# Altium PCB USB2CAN_acsii.PcbDoc
Units mm, origin at the board's own origin, x right, y up, seen from the top; angles counter-clockwise.
Board outline 42 x 17 mm, 2 copper layers (Top Layer, Bottom Layer), stack 1.671 mm thick; 23 components, 13 nets, 125 pads, 41 vias.
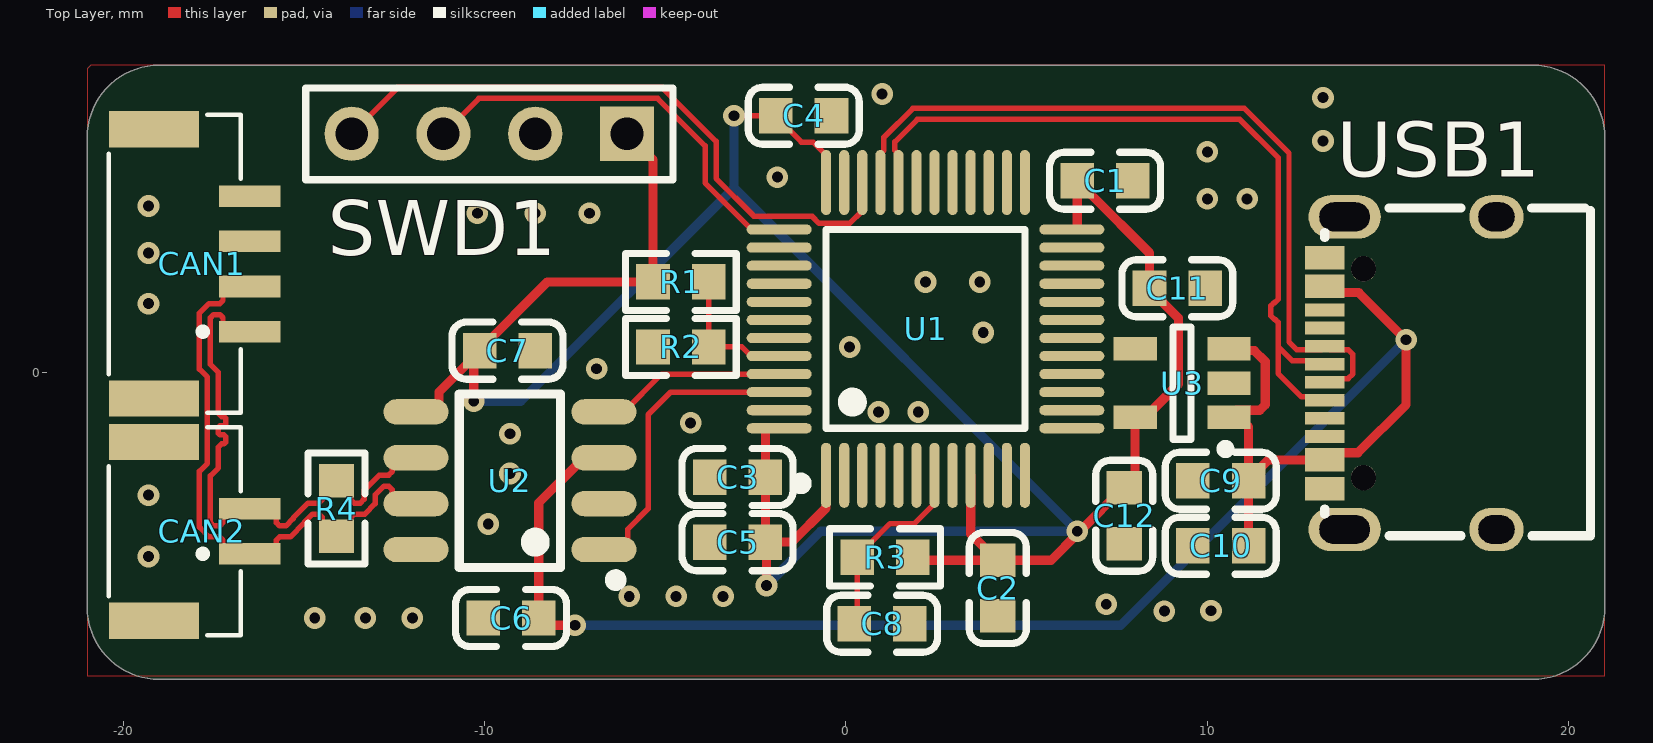
[diagram p0: Top Layer view]
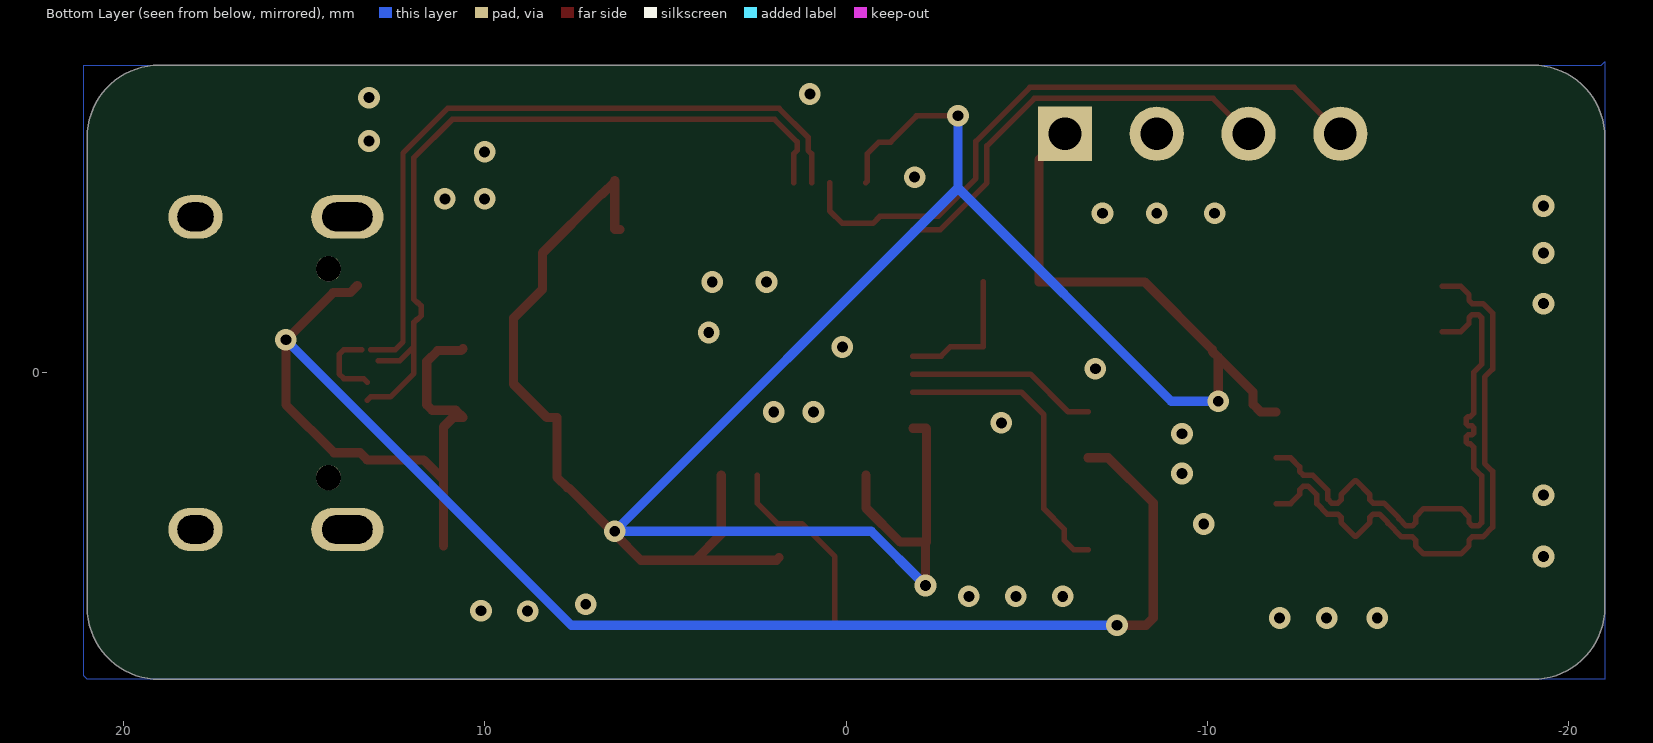
[diagram p1: Bottom Layer view, seen from below]

## Layer stack, top to bottom
Top Solder: solder mask 0.0102, Solder Resist, Dk 3.5
Top Layer: signal copper 0.0356
Dielectric 1: dielectric 1.6, FR-4, Dk 4.8
Bottom Layer: signal copper 0.0356
Bottom Solder: solder mask 0.0102, Solder Resist, Dk 3.5

## Board outline
-21,-6.5 -21,6.5 cw(c-19,6.5) -19,8.5 19,8.5 cw(c19,6.5) 21,6.5 21,-6.5 cw(c19,-6.5) 19,-8.5 -19,-8.5 cw(c-19,-6.5)

## Design rules (kind name [scope] priority, off if disabled: settings)
AssemblyTestPointUsage [All] p0: scope1count=1 scope1_0_kind=Board scope1_0_value=Board scope2count=1 scope2_0_kind=Board scope2_0_value=Board commentlength=0
AssemblyTestpoint [All] p0: scope1count=1 scope1_0_kind=Board scope1_0_value=Board scope2count=1 scope2_0_kind=Board scope2_0_value=Board commentlength=0
BoardOutlineClearance [All] p0: scope1count=1 scope1_0_kind=Board scope1_0_value=Board scope2count=1 scope2_0_kind=Board scope2_0_value=Board commentlength=0 gap=0.2
BoardOutlineClearance [All] p1: gap=0.2 ignorepadtopadclearanceinfootprint=FALSE
Clearance [All] p0: scope1count=1 scope1_0_kind=Board scope1_0_value=Board scope2count=1 scope2_0_kind=Board scope2_0_value=Board commentlength=0 gap=0.152
Clearance [All] p1: gap=0.152 ignorepadtopadclearanceinfootprint=TRUE
ComponentClearance [All] p0: scope1count=1 scope1_0_kind=Board scope1_0_value=Board scope2count=1 scope2_0_kind=Board scope2_0_value=Board commentlength=0 gap=0.254 collisioncheckmode=3
DiffPairsRouting [All] p0: scope1count=1 scope1_0_kind=Board scope1_0_value=Board scope2count=1 scope2_0_kind=Board scope2_0_value=Board commentlength=0
DiffPairsRouting [All] p1: maxlimit=0.152 minlimit=0.152 mostfreqgap=0.152 toplayer_minwidth=0.152 toplayer_maxwidth=0.152 toplayer_prefwidth=0.152 bottomlayer_minwidth=0.152 bottomlayer_maxwidth=0.152 bottomlayer_prefwidth=0.152 maxuncoupledlength=12.7
FabricationTestPointUsage [All] p0: scope1count=1 scope1_0_kind=Board scope1_0_value=Board scope2count=1 scope2_0_kind=Board scope2_0_value=Board commentlength=0 valid=0 allowmultiple=FALSE
FabricationTestpoint [All] p0: scope1count=1 scope1_0_kind=Board scope1_0_value=Board scope2count=1 scope2_0_kind=Board scope2_0_value=Board commentlength=0 side=3 testpointundercomponent=TRUE minsize=1.016 maxsize=2.54 preferedsize=1.524 minholesize=0 maxholesize=1.016 preferedholesize=0.813 testpointgrid=0.025
FanoutControl Fanout_Default [All] p0: scope1count=1 scope1_0_kind=Board scope1_0_value=Board scope2count=1 scope2_0_kind=Board scope2_0_value=Board commentlength=30 // Fanout_Default (Default Rule)
FanoutControl Fanout_Small [All] p0 off: scope1count=1 scope1_0_kind=Board scope1_0_value=Board scope2count=1 scope2_0_kind=Board scope2_0_value=Board commentlength=84 // Protel DXP Scope 1 Expression Was: (CompPinCount < 5)   Fanout_Small (Default Rule)
FanoutControl Fanout_SOIC [All] p0 off: scope1count=1 scope1_0_kind=Board scope1_0_value=Board scope2count=1 scope2_0_kind=Board scope2_0_value=Board commentlength=71 // Protel DXP Scope 1 Expression Was: IsSOIC   Fanout_SOIC (Default Rule)
FanoutControl Fanout_LCC [All] p0 off: scope1count=1 scope1_0_kind=Board scope1_0_value=Board scope2count=1 scope2_0_kind=Board scope2_0_value=Board commentlength=69 // Protel DXP Scope 1 Expression Was: IsLCC   Fanout_LCC (Default Rule)
FanoutControl Fanout_BGA [All] p0 off: scope1count=1 scope1_0_kind=Board scope1_0_value=Board scope2count=1 scope2_0_kind=Board scope2_0_value=Board commentlength=69 // Protel DXP Scope 1 Expression Was: IsBGA   Fanout_BGA (Default Rule)
Height [All] p0: scope1count=1 scope1_0_kind=Board scope1_0_value=Board scope2count=1 scope2_0_kind=Board scope2_0_value=Board commentlength=0
HoleSize [All] p0: scope1count=1 scope1_0_kind=Board scope1_0_value=Board scope2count=1 scope2_0_kind=Board scope2_0_value=Board commentlength=0 absolutevalues=TRUE maxlimit=10 minlimit=0.025 maxpercent=80.000 minpercent=20.000
HoleSize [All] p1: absolutevalues=TRUE maxlimit=10 minlimit=0.025 maxpercent=80.000 minpercent=20.000
HoleToHoleClearance [All] p0: scope1count=1 scope1_0_kind=Board scope1_0_value=Board scope2count=1 scope2_0_kind=Board scope2_0_value=Board commentlength=0
LayerPairs [All] p0: scope1count=1 scope1_0_kind=Board scope1_0_value=Board scope2count=1 scope2_0_kind=Board scope2_0_value=Board commentlength=0 enforce=TRUE
MinimumSolderMaskSliver [All] p0: scope1count=1 scope1_0_kind=Board scope1_0_value=Board scope2count=1 scope2_0_kind=Board scope2_0_value=Board commentlength=0
MinimumSolderMaskSliver [All] p1: minsoldermaskwidth=0
NetAntennae [All] p0: scope1count=1 scope1_0_kind=Board scope1_0_value=Board scope2count=1 scope2_0_kind=Board scope2_0_value=Board commentlength=0
PasteMaskExpansion [All] p0: scope1count=1 scope1_0_kind=Board scope1_0_value=Board scope2count=1 scope2_0_kind=Board scope2_0_value=Board commentlength=0 expansion=0
PlaneClearance [All] p0: scope1count=1 scope1_0_kind=Board scope1_0_value=Board scope2count=1 scope2_0_kind=Board scope2_0_value=Board commentlength=0 clearance=0.508
PlaneConnect [All] p0: scope1count=1 scope1_0_kind=Board scope1_0_value=Board scope2count=1 scope2_0_kind=Board scope2_0_value=Board commentlength=0 planeconnectstyle=Relief reliefexpansion=0.508 reliefentries=4 reliefconductorwidth=0.254 reliefairgap=0.254
PolygonConnect [All] p0: scope1count=1 scope1_0_kind=Board scope1_0_value=Board scope2count=1 scope2_0_kind=Board scope2_0_value=Board commentlength=0 connectstyle=Direct reliefconductorwidth=0.254 reliefentries=4 polygonreliefangle="90 Angle"
PolygonConnect [All] p1: connectstyle=Direct reliefconductorwidth=0.254 reliefentries=4 polygonreliefangle="90 Angle" airgapwidth=0.254
RoutingCorners [All] p0: scope1count=1 scope1_0_kind=Board scope1_0_value=Board scope2count=1 scope2_0_kind=Board scope2_0_value=Board commentlength=0 cornerstyle=45-Degree minsetback=2.54 maxsetback=2.54
RoutingLayers [All] p0: scope1count=1 scope1_0_kind=Board scope1_0_value=Board scope2count=1 scope2_0_kind=Board scope2_0_value=Board commentlength=0 top layer=Automatic bottom layer=Automatic
RoutingPriority [All] p0: scope1count=1 scope1_0_kind=Board scope1_0_value=Board scope2count=1 scope2_0_kind=Board scope2_0_value=Board commentlength=0
RoutingTopology [All] p0: scope1count=1 scope1_0_kind=Board scope1_0_value=Board scope2count=1 scope2_0_kind=Board scope2_0_value=Board commentlength=0 topology=Shortest
RoutingVias [All] p0: scope1count=1 scope1_0_kind=Board scope1_0_value=Board scope2count=1 scope2_0_kind=Board scope2_0_value=Board commentlength=0 holewidth=0.711 width=1.27 viastyle="Through Hole" minholewidth=0.711 minwidth=1.27 maxholewidth=0.711 maxwidth=1.27
RoutingVias [All] p1: holewidth=0.711 width=1.27 viastyle="Through Hole" minholewidth=0.711 minwidth=1.27 maxholewidth=0.711 maxwidth=1.27 useviatemplates=TRUE viatemplateguid#1={478E94E7-4BE6-4715-A8F8-C5F01D15FB3F} viatemplatename#1=v60h30m0mx0
ShortCircuit [All] p0: scope1count=1 scope1_0_kind=Board scope1_0_value=Board scope2count=1 scope2_0_kind=Board scope2_0_value=Board commentlength=0 allowed=FALSE
SilkToBoardRegionClearance [All] p0: scope1count=1 scope1_0_kind=Board scope1_0_value=Board scope2count=1 scope2_0_kind=Board scope2_0_value=Board commentlength=0
SilkToSilkClearance [All] p0: scope1count=1 scope1_0_kind=Board scope1_0_value=Board scope2count=1 scope2_0_kind=Board scope2_0_value=Board commentlength=0
SilkToSilkClearance [All] p1: silktosilkclearance=0
SilkToSolderMaskClearance [All] p0 off: scope1count=1 scope1_0_kind=Board scope1_0_value=Board scope2count=1 scope2_0_kind=Board scope2_0_value=Board commentlength=44 // Protel DXP Scope 1 Expression Was: IsPad
SilkToSolderMaskClearance [IsPad] p1: minsilkscreentomaskgap=0 clearancetoexposedcopper=TRUE
SolderMaskExpansion [All] p0: scope1count=1 scope1_0_kind=Board scope1_0_value=Board scope2count=1 scope2_0_kind=Board scope2_0_value=Board commentlength=0 expansion=0.102
SolderMaskExpansion [All] p1: expansion=0.102 istentingtop=FALSE
UnRoutedNet [All] p0: scope1count=1 scope1_0_kind=Board scope1_0_value=Board scope2count=1 scope2_0_kind=Board scope2_0_value=Board commentlength=0
UnpouredPolygon [All] p0: scope1count=1 scope1_0_kind=Board scope1_0_value=Board scope2count=1 scope2_0_kind=Board scope2_0_value=Board commentlength=0
Width [All] p0: scope1count=1 scope1_0_kind=Board scope1_0_value=Board scope2count=1 scope2_0_kind=Board scope2_0_value=Board commentlength=0 maxlimit=10 minlimit=0.152 preferedwidth=0.254
Width [All] p1: maxlimit=10 minlimit=0.152 preferedwidth=0.254
25 further rules are at their usual default settings.

## Classes and differential pairs
differential pair USB: +USB_P -USB_N
differential pair " ": +CAN_P -CAN_N

## Components (designator, comment, footprint, x,y, rotation, side; value= is the part's Value field where it differs from the comment)
C1 "0.1uF" 0603_C 7.17,5.3 r180 top
C2 "0.1uF" 0603_C 4.2,-5.97 r90 top
C3 "0.1uF" 0603_C -3,-2.9 r0 top
C4 "0.1uF" 0603_C -1.17,7.1 r180 top
C5 "0.1uF" 0603_C -3,-4.7 r0 top
C6 "0.1uF" 0603_C -9.27,-6.8 r0 top
C7 "0.1uF" 0603_C -9.37,0.6 r0 top
C8 "1uF" 0603_C 0.999,-6.959 r180 top
C9 "10uF" 0603_C 10.37,-3 r0 top
C10 "0.1uF" 0603_C 10.37,-4.8 r0 top
C11 "0.1uF" 0603_C 9.17,2.325 r180 top
C12 "10uF" 0603_C 7.7,-3.97 r90 top
CAN1 "GH1.25-4" SM04B-GHS_X1251WRS-04HF-LPSW -20.8,3 r270 top
CAN2 "GH1.25-2" SM02B-GHS_X1251WRS-02HF-LPSW -20.8,-4.4 r270 top
R1 "R" 0603_R -4.57,2.5 r180 top
R2 "10K" 0603_R -4.57,0.7 r180 top
R3 "10K" 0603_R 1.08,-5.123 r0 top
R4 "120" 0603_R -14.1,-3.77 r270 top
SWD1 "Header 4" HDR1X4 -6.06,6.6 r180 top
U1 "STM32F072CBT6" LQFP-48_7x7x05P 2.2,1.2 r0 top
U2 "TJA1042T/3" SOP8 -9.3,-3 r90 top
U3 "LP5907-3.3" TSOT23-5 9.3,-0.3 r180 top
USB1 "TYPE-C 16PIN 2MD(073)" USB-C-SMD_TYPE-C-6PIN-2MD-073 15.625,-0.025 r90 top

## Footprints (in the part's own frame and the unit in brackets; to place one, negate y for a bottom-side part, rotate by r counter-clockwise, add the part's x,y. Pads: shape width x height; smd on the part's side, far side on the other; paste and mask are expansions set on the pad)
0603_C [mm]
  rect 0.93x0.98 smd: 1(-0.77,0) 2(0.77,0)
  silkscreen extent -1.53,-0.79 1.54,0.79
0603_R [mm]
  rect 0.93x0.98 smd: 1(-0.77,0) 2(0.77,0)
  silkscreen extent -1.53,-0.79 1.54,0.79
HDR1X4 [mm] "Connector; Header; 4 Position"
  rect 1.5x1.5 hole 0.9: 1(0,0)
  round 1.5 hole 0.9: 2(2.54,0) 3(5.08,0) 4(7.62,0)
  silkscreen extent -1.27,-1.27 8.89,1.27
LQFP-48_7x7x05P [mm]
  oval 0.28x1.8 smd mask+0: 1(-2.75,-4.05) 2(-2.25,-4.05) 3(-1.75,-4.05) 4(-1.25,-4.05) 5(-0.75,-4.05) 6(-0.25,-4.05) 7(0.25,-4.05) 8(0.75,-4.05) 9(1.25,-4.05) 10(1.75,-4.05) 11(2.25,-4.05) 12(2.75,-4.05) 25(2.75,4.05) 26(2.25,4.05) 27(1.75,4.05) 28(1.25,4.05) 29(0.75,4.05) 30(0.25,4.05) 31(-0.25,4.05) 32(-0.75,4.05) 33(-1.25,4.05) 34(-1.75,4.05) 35(-2.25,4.05) 36(-2.75,4.05)
  oval 1.8x0.28 smd mask+0: 13(4.05,-2.75) 14(4.05,-2.25) 15(4.05,-1.75) 16(4.05,-1.25) 17(4.05,-0.75) 18(4.05,-0.25) 19(4.05,0.25) 20(4.05,0.75) 21(4.05,1.25) 22(4.05,1.75) 23(4.05,2.25) 24(4.05,2.75) 37(-4.05,2.75) 38(-4.05,2.25) 39(-4.05,1.75) 40(-4.05,1.25) 41(-4.05,0.75) 42(-4.05,0.25) 43(-4.05,-0.25) 44(-4.05,-0.75) 45(-4.05,-1.25) 46(-4.05,-1.75) 47(-4.05,-2.25) 48(-4.05,-2.75)
  silkscreen extent -3.6,-4.42 2.75,2.75
SM02B-GHS_X1251WRS-02HF-LPSW [mm]
  rect 1x2.5 smd: 0(-2.475,1.65) 0(2.475,1.65)
  rect 0.6x1.7 smd: 1(0.625,4.3) 2(-0.625,4.3)
  silkscreen extent -2.87,0.4 2.88,4.05
SM04B-GHS_X1251WRS-04HF-LPSW [mm]
  rect 1x2.5 smd: 0(-3.725,1.65) 0(3.725,1.65)
  rect 0.6x1.7 smd: 1(1.875,4.3) 2(0.625,4.3) 3(-0.625,4.3) 4(-1.875,4.3)
  silkscreen extent -4.13,0.4 4.13,4.05
SOP8 [mm]
  oval 0.7x1.8 smd: 1(-1.905,-2.6) 2(-0.635,-2.6) 3(0.635,-2.6) 4(1.905,-2.6) 5(1.905,2.6) 6(0.635,2.6) 7(-0.635,2.6) 8(-1.905,2.6)
  silkscreen extent -2.9,-3.08 2.4,1.4
TSOT23-5 [mm]
  rect 1.2x0.65 smd: 1(-1.3,0.95) 2(-1.3,0) 3(-1.3,-0.95) 4(1.3,-0.95) 5(1.3,0.95)
  silkscreen extent -1.33,-1.55 0.25,1.95
USB-C-SMD_TYPE-C-6PIN-2MD-073 [mm]
  rect 0.65x1.1 smd: 1(-3.2,2.375) 2(-2.4,2.375) 11(2.4,2.375) 12(3.2,2.375)
  rect 0.35x1.1 smd: 3(-1.75,2.375) 4(-1.25,2.375) 5(-0.75,2.375) 6(-0.25,2.375) 7(0.25,2.375) 8(0.75,2.375) 9(1.25,2.375) 10(1.75,2.375)
  oval 1.2x1.5 hole 0.8 slot 1 at 90 deg: 13(-4.325,-2.375) 14(4.325,-2.375)
  oval 1.2x2 hole 0.8 slot 1.4 at 90 deg: 13(-4.325,1.825) 14(4.325,1.825)
  round 0.7 hole 0.7 unplated: ""(-2.89,1.305) ""(2.89,1.305)
  silkscreen extent -4.5,-4.97 4.57,2.38

## Part data
C1 C2 C3 C4 C5 C6 C7 C8 C9 C10 C11 C12: library part CAP, "Capacitor"
R1 R2 R3 R4: library part RES, "Resistor"
SWD1: "Header, 4-Pin"
U1: library part STM32F072C8T6, "ARM Cortex-M0 32-bit MCU, 128 KB Flash, 4 KB Internal RAM, 39 I/Os, 48-pin LQFP, -40 to 85 degC, Tray"
U3: library part LP5907

## Via types
v1: diameter 0.6, hole 0.3, Top Layer to Bottom Layer, 41 vias

## Nets (pads, with @x,y where several pads share a name; then routed paths per layer and width w, separated by ;. In a path a pad name is that pad's centre, name@x,y a point inside that pad or via, vN(x,y) a via of type N, cw(c..) or ccw(c..) an arc to the next point about the centre after c; other vN are vias at no path point)
3V3: C1.2 C2.2 C3.2 C4.2 C5.2 C7.1 C11.2 C12.2 R1.2 R3.2 SWD1.1 U1.1 U1.9 U1.24 U1.36 U1.48 U2.5 U3.5 | length 81
  Top Layer w0.152: v1(-3.1,7.1) C4.2 -1.94,7.075 -1.234,6.369 -0.909,6.369 -0.592,6.052 -0.592,5.292 U1.36
  Top Layer w0.254: U2.5 -11.471,-1.095 -11.265,-0.889 -11.265,-0.55 C7.1@-10.3,0.415 ; v1(-10.3,-0.8) C7.1@-10.3,0.415 ; SWD1.1 -5.34,5.88 R1.2 -8.265,2.5 -10.14,0.625 C7.1 -10.14,0.575 C7.1@-10.3,0.415 ; v1(-2.2,-5.9) -2.2,-4.73 C5.2 ; U1.48 -2.218,-1.55 -2.23,-1.562 C3.2 C5.2 ; U1.1 -0.555,-2.855 -0.555,-3.755 -1.5,-4.7 C5.2 ; R3.2 1.927,-5.2 C2.2@4.175,-5.2 ; U1.9 3.45,-4.475 C2.2@4.175,-5.2 ; U1.24 6.388,3.95 6.4,3.962 C1.2@6.4,5.275 ; C2.2@4.175,-5.2 C2.2 5.675,-5.2 6.4,-4.475 v1(6.4,-4.4) 6.475,-4.4 7.675,-3.2 C12.2 8,-2.9 U3.5 8.275,-1.25 9.2,-0.325 9.2,1.5 8.4,2.3 8.4,3.3 6.763,4.937 6.738,4.937 C1.2@6.4,5.275 ; C1.2@6.4,5.275 C1.2 C1.2@6.4,5.275
  Bottom Layer w0.254: v1(-10.3,-0.8) -9,-0.8 -3.1,5.1 ; v1(-3.1,7.1) -3.1,5.1 ; v1(-2.2,-5.9) -0.7,-4.4 v1(6.4,-4.4) -3.1,5.1
5V: C6.2 C9.2 C10.2 U2.3 U3.1 U3.3 USB1.2 USB1.11 | length 49.9
  Top Layer w0.254: v1(-7.5,-7) -8.3,-7 C6.2 -8.5,-3.615 -7.25,-2.365 U2.3 ; U3.3 10.65,0.6 11.3,0.6 11.6,0.3 11.6,-0.9 11.448,-1.052 10.798,-1.052 U3.1 10.875,-1.25 11.14,-1.515 C9.2@11.14,-2.975 ; C10.2 C9.2 C9.2@11.14,-2.975 ; USB1.11@13.525,2.4 13.721,2.204 14.191,2.204 15.495,0.9 v1(15.5,0.9) 15.5,-0.894 14.165,-2.229 13.446,-2.229 USB1.2 11.69,-2.425 C9.2@11.14,-2.975
  Bottom Layer w0.254: v1(-7.5,-7) -7,-7 7.6,-7 v1(15.5,0.9)
CAN_N: CAN1.1 CAN2.2 R4.1 U2.6 | length 15.8
  Top Layer w0.152: CAN1.1 -17.016,1.125 -17.24,1.349 -17.24,1.509 -17.329,1.598 -17.499,1.598 -17.588,1.509 -17.588,0.216 -17.368,-0.005 -17.368,-0.812 -17.368,-1.138 -17.279,-1.227 -17.218,-1.227 -17.168,-1.277 -17.168,-1.429 -17.218,-1.479 -17.318,-1.479 -17.368,-1.529 -17.368,-1.681 -17.318,-1.731 -17.218,-1.731 -17.168,-1.781 -17.168,-1.933 -17.218,-1.983 -17.279,-1.983 -17.368,-2.072 -17.368,-2.4 -17.368,-2.645 -17.588,-2.866 -17.588,-4.159 -17.499,-4.248 -17.329,-4.248 -17.24,-4.159 -17.24,-3.999 -17.016,-3.775 CAN2.2 -15.984,-3.775 -15.76,-3.999 -15.76,-4.159 -15.671,-4.248 -15.501,-4.248 -15.3,-4.048 -15.3,-4.033 -14.885,-3.618 -14.589,-3.618 -14.5,-3.529 -14.5,-3.389 -14.111,-3 R4.1 -14.089,-3 -13.7,-3.389 -13.7,-3.529 -13.611,-3.618 -13.441,-3.618 -13.332,-3.509 -13.332,-3.27 -12.91,-2.848 -12.658,-2.848 -12.555,-2.744 -12.555,-2.618 -12.302,-2.365 U2.6
CAN_P: CAN1.2 CAN2.1 R4.2 U2.7 | length 16.3
  Top Layer w0.152: CAN1.2 -17.016,2.375 -17.24,2.151 -17.24,1.991 -17.329,1.902 -17.625,1.902 -17.892,1.635 -17.892,0.09 -17.672,-0.131 -17.672,-2.519 -17.892,-2.74 -17.892,-4.285 -17.625,-4.552 -17.329,-4.552 -17.24,-4.641 -17.24,-4.801 -17.016,-5.025 CAN2.1 -15.984,-5.025 -15.76,-4.801 -15.76,-4.641 -15.671,-4.552 -15.375,-4.552 -14.996,-4.174 -14.996,-4.159 -14.759,-3.922 -14.589,-3.922 -14.5,-4.011 -14.5,-4.151 -14.111,-4.54 R4.2 -14.089,-4.54 -13.7,-4.151 -13.7,-4.011 -13.611,-3.922 -13.315,-3.922 -13.028,-3.635 -13.028,-3.396 -12.784,-3.152 -12.658,-3.152 -12.555,-3.256 -12.555,-3.382 -12.302,-3.635 U2.7
CAN_RX: U1.45 U2.4 | length 5.3
  Top Layer w0.152: U2.4 -6.15,-1.095 -5.105,-0.05 U1.45
CAN_TX: U1.46 U2.1 | length 8.4
  Top Layer w0.152: U2.1 -6.298,-4.905 -6.045,-4.652 -6.045,-4.348 -5.473,-3.775 -5.473,-1.173 -4.85,-0.55 U1.46
GND: C1.1 C2.1 C3.1 C4.1 C5.1 C6.1 C7.2 C8.1 C9.1 C10.1 C11.1 C12.1 CAN1.0 CAN1.3 CAN2.0 R2.2 SWD1.2 U1.8 U1.23 U1.35 U1.47 U2.2 U2.8 U3.2 USB1.1 USB1.13 USB1.14
  other v1: -14.7,-6.8 -13.3,-6.8 -12,-6.8 8.809,-6.609 10.1,-6.6 7.2,-6.421 -6,-6.2 -4.7,-6.2 -3.4,-6.2 -19.3,-5.1 -9.9,-4.2 -19.3,-3.4 -9.3,-2.8 -9.3,-1.7 -4.3,-1.4 0.9,-1.1 2,-1.1 -6.9,0.1 0.1,0.7 3.8,1.1 -19.3,1.9 2.2,2.5 3.7,2.5 -19.3,3.3 -10.2,4.4 -8.6,4.4 -7.1,4.4 -19.3,4.6 10,4.8 11.1,4.8 -1.9,5.4 10,6.1 13.2,6.4 13.2,7.6 1,7.7
NetR1_1: R1.1 R2.1 U1.44 | length 3.9
  Top Layer w0.152: R1.1 R2.1 -2.88,0.7 -2.63,0.45 U1.44
NRST: C8.2 R3.1 U1.7 | length 5.4
  Top Layer w0.152: C8.2 0.31,-6.879 R3.1 0.31,-5.098 1.222,-4.185 1.895,-4.185 2.45,-3.63 U1.7
SWCLK: SWD1.3 U1.37 | length 11.8
  Top Layer w0.152: SWD1.3 -10.162,7.578 -5.216,7.578 -3.9,6.262 -3.9,5.24 -2.61,3.95 U1.37
SWDIO: SWD1.4 U1.34 | length 17.7
  Top Layer w0.152: SWD1.4 -12.398,7.882 -5.09,7.882 -3.596,6.388 -3.596,5.366 -2.548,4.318 -0.938,4.318 -0.742,4.122 0.102,4.122 0.45,4.47 U1.34
USB_N: U1.32 USB1.5 USB1.7 | length 21.4
  Top Layer w0.152: U1.32 1.45,6.045 1.352,6.143 1.352,6.378 1.974,7 10.896,7 11.955,5.941 11.955,2.544 11.955,2.016 11.865,1.926 11.845,1.926 11.755,1.835 11.755,1.564 11.845,1.474 11.865,1.474 11.955,1.383 11.955,1.3 11.955,0.714 ; USB1.7@12.946,0.322 12.606,0.322 12.605,0.323 12.346,0.323 11.955,0.714 ; USB1.5 13.153,-0.678 12.606,-0.678 11.955,-0.027 11.955,0.714
USB_P: U1.33 USB1.6 USB1.8 | length 21.7
  Top Layer w0.152: U1.33 0.95,6.045 1.048,6.143 1.048,6.504 1.848,7.304 11.022,7.304 12.259,6.067 12.259,0.84 12.472,0.627 12.605,0.627 12.606,0.628 USB1.8@13.153,0.628 ; USB1.6 13.347,-0.178 13.894,-0.178 14.028,-0.044 14.028,0.494 13.894,0.628 USB1.8@13.394,0.628
pads on no net: CAN1.4 U1.2 U1.3 U1.4 U1.5 U1.6 U1.10 U1.11 U1.12 U1.13 U1.14 U1.15 U1.16 U1.17 U1.18 U1.19 U1.20 U1.21 U1.22 U1.25 U1.26 U1.27 U1.28 U1.29 U1.30 U1.31 U1.38 U1.39 U1.40 U1.41 U1.42 U1.43 U3.4 USB1. USB1.3 USB1.4 USB1.9 USB1.10 USB1.12

## Polygon pours and split planes (outlines as drawn)
GND on Top Layer "GND_L01_P001" (solid, remove dead copper, pour order 1): -20.9,8.5 -21,8.4 -21,-8.4 21,-8.4 21,8.5
GND on Bottom Layer "GND_L02_P002" (solid, remove dead copper, pour order 2): -21,8.6 -21,-8.5 21,-8.5 21.1,-8.4 21.1,8.5 -20.9,8.5

## Silkscreen, mask and mechanical layers (free items; w line width, h text height)
Mechanical 1:
  the board outline again, w0.4